# EAGLE board xmas (EAGLE 6.0)
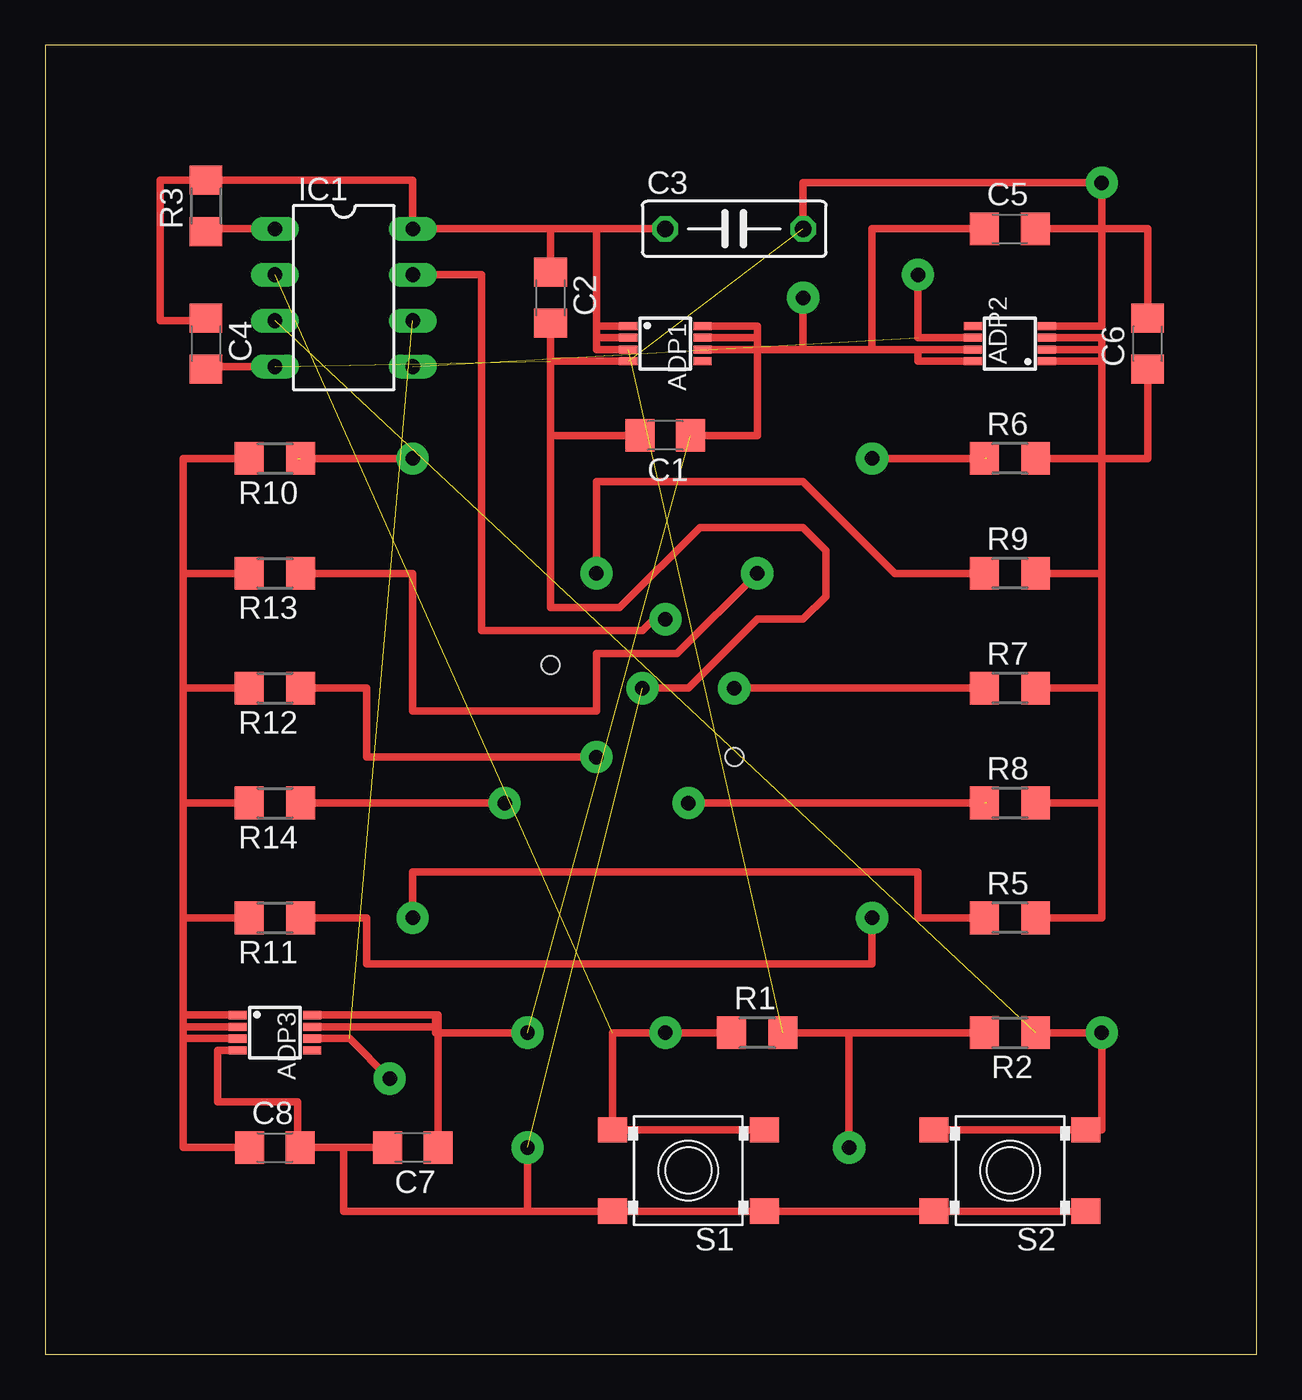
[diagram p0: board, top side]

Size 66.98 x 72.38 mm. Coordinates in mm from the lower left corner, seen from the top.
Outline: 0,0 66.98,0 66.98,72.38 0,72.38 0,0
Copper layers (1*16): Top 0.035mm / dielectric 1.5mm / Bottom 0.035mm
Design rules: minimum track width 10mil, minimum drill 24mil, track to track 8mil, track to pad 8mil, pad to pad 8mil, via to via 8mil, smd to smd 8mil, copper to edge 40mil, drill to drill 8mil, minimum pad ring 10mil, minimum via ring 8mil, stop-mask expansion 4mil, vias tented up to drill 0mil, thermal gap 10mil
Holes 1 mm at 38.1,33.02 27.94,38.1

## Footprints (pad centres in the part's own frame; a part is rotated, then mirrored left to right if it is on the bottom)
MSOP8 = smd 0.45 x 1: GND 0.975,-2.05; IN1 -0.975,2.05; IN2 -0.325,2.05; NR 0.975,2.05; OUT1 -0.975,-2.05; OUT2 -0.325,-2.05; OUT3 0.325,-2.05; SD 0.325,2.05
C1206 = smd 1.6 x 1.8: 1 -1.4,0; 2 1.4,0
C075-032X103 = drill 0.914 octagon: 1 -3.81,0; 2 3.81,0
DIL08 = drill 0.813 long: 1 -3.81,-3.81; 2 -1.27,-3.81; 3 1.27,-3.81; 4 3.81,-3.81; 5 3.81,3.81; 6 1.27,3.81; 7 -1.27,3.81; 8 -3.81,3.81
LSP10 = drill 0.8 pad 1.778: MP 0,0
R1206 = smd 1.6 x 1.803: 1 -1.422,0; 2 1.422,0
SKHMPXE010 = smd 1.6 x 1.4: 1 -4.2,2.25; 2 4.2,2.25; 3 -4.2,-2.25; 4 4.2,-2.25

## Placement (x,y rotation side)
ADP1  ADP3335MSOP8  [MSOP8]  34.29,55.88 270 top
ADP2  ADP3335MSOP8  [MSOP8]  53.34,55.88 90 top
ADP3  ADP3335MSOP8  [MSOP8]  12.7,17.78 270 top
C1  1uF  [C1206]  34.29,50.8 180 top
C2  1uF  [C1206]  27.94,58.42 270 top
C3  47uF  [C075-032X103]  38.1,62.23 0 top
C4  1uF  [C1206]  8.89,55.88 270 top
C5  1uF  [C1206]  53.34,62.23 0 top
C6  1uF  [C1206]  60.96,55.88 90 top
C7  1uF  [C1206]  20.32,11.43 180 top
C8  1uF  [C1206]  12.7,11.43 0 top
IC1  TINY13-20PU  [DIL08]  16.51,58.42 270 top
LSP1  LSP10  [LSP10]  20.32,24.13 0 top
LSP2  LSP10  [LSP10]  45.72,49.53 0 top
LSP3  LSP10  [LSP10]  38.1,36.83 0 top
LSP4  LSP10  [LSP10]  35.56,30.48 0 top
LSP5  LSP10  [LSP10]  30.48,43.18 0 top
LSP6  LSP10  [LSP10]  20.32,49.53 0 top
LSP7  LSP10  [LSP10]  45.72,24.13 0 top
LSP8  LSP10  [LSP10]  30.48,33.02 0 top
LSP9  LSP10  [LSP10]  39.37,43.18 0 top
LSP10  LSP10  [LSP10]  25.4,30.48 0 top
LSP11  LSP10  [LSP10]  34.29,40.64 0 top
LSP12  LSP10  [LSP10]  41.91,58.42 0 top
LSP13  LSP10  [LSP10]  58.42,64.77 0 top
LSP14  LSP10  [LSP10]  33.02,36.83 0 top
LSP15  LSP10  [LSP10]  19.05,15.24 0 top
LSP16  LSP10  [LSP10]  26.67,11.43 0 top
LSP17  LSP10  [LSP10]  34.29,17.78 0 top
LSP18  LSP10  [LSP10]  48.26,59.69 0 top
LSP19  LSP10  [LSP10]  58.42,17.78 0 top
LSP20  LSP10  [LSP10]  44.45,11.43 0 top
LSP21  LSP10  [LSP10]  26.67,17.78 0 top
R1  10k  [R1206]  39.37,17.78 0 top
R2  10k  [R1206]  53.34,17.78 180 top
R3  10k  [R1206]  8.89,63.5 90 top
R5  30  [R1206]  53.34,24.13 0 top
R6  30  [R1206]  53.34,49.53 0 top
R7  30  [R1206]  53.34,36.83 0 top
R8  30  [R1206]  53.34,30.48 0 top
R9  30  [R1206]  53.34,43.18 0 top
R10  30  [R1206]  12.7,49.53 180 top
R11  30  [R1206]  12.7,24.13 180 top
R12  30  [R1206]  12.7,36.83 180 top
R13  30  [R1206]  12.7,43.18 180 top
R14  30  [R1206]  12.7,30.48 180 top
S1  SKHMPSE010  [SKHMPXE010]  35.56,10.16 180 top
S2  SKHMPSE010  [SKHMPXE010]  53.34,10.16 180 top

## Library data of the parts
ADP1-ADP3 LSP1-LSP21 S1 S2 = Gumix
C1-C8 R1-R3 R5-R14 = rcl
IC1 = atmel; MPN: ATTINY13-20PU; OC_FARNELL: 9171550; OC_NEWARK: 96K6521

## Nets
+5V: ADP1.OUT1 ADP1.OUT2 ADP1.OUT3 C2.1 C3.1 C4.1 IC1.8 LSP20.MP R1.2 R2.2 R3.2
GND: ADP1.GND ADP2.GND ADP3.GND C1.2 C2.2 C3.2 C4.2 C5.2 C6.2 C7.2 C8.2 IC1.4 LSP13.MP LSP14.MP LSP16.MP S1.1 S1.2 S2.1 S2.2
N$1: IC1.2 LSP17.MP R1.1 S1.3 S1.4
N$2: IC1.3 LSP19.MP R2.1 S2.3 S2.4
N$3: IC1.1 R3.1
N$4: ADP2.OUT1 ADP2.OUT2 ADP2.OUT3 C6.1 R5.2 R6.2 R7.2 R8.2 R9.2
N$5: LSP1.MP R5.1
N$6: IC1.7 LSP11.MP
N$7: LSP2.MP R6.1
N$8: LSP3.MP R7.1
N$9: LSP4.MP R8.1
N$10: LSP5.MP R9.1
N$11: LSP6.MP R10.1
N$12: ADP3.OUT1 ADP3.OUT2 ADP3.OUT3 C8.1 R10.2 R11.2 R12.2 R13.2 R14.2
N$13: LSP7.MP R11.1
N$14: LSP8.MP R12.1
N$15: LSP9.MP R13.1
N$16: LSP10.MP R14.1
OC0A: ADP2.SD IC1.5 LSP18.MP
OC0B: ADP3.SD IC1.6 LSP15.MP
VCC: ADP1.IN1 ADP1.IN2 ADP1.SD ADP2.IN1 ADP2.IN2 ADP3.IN1 ADP3.IN2 C1.1 C5.1 C7.1 LSP12.MP LSP21.MP

## Tracks (layer width: path | path; a pad name or v marks a point on that pad's centre or on a via)
+5V  (1 unrouted)
  Top 0.406: C2.1 27.94,62.23 | 27.94,62.23 IC1.8 20.32,64.92 R3.2 6.35,64.92 6.35,57.15 8.89,57.15 C4.1 | ADP1.OUT3 30.48,55.55 30.48,56.2 | 30.48,56.2 30.48,56.85 | 30.48,56.85 30.48,62.23 | ADP1.OUT1 30.48,56.85 | ADP1.OUT2 30.48,56.2 | 27.94,62.23 30.48,62.23 | 30.48,62.23 C3.1 | R1.2 44.45,17.78 | 44.45,17.78 R2.2 | LSP20.MP 44.45,17.78
GND  (3 unrouted)
  Top 0.406: LSP14.MP 35.56,36.83 39.37,40.64 41.91,40.64 43.18,41.91 43.18,44.45 41.91,45.72 36.2,45.72 31.75,41.27 27.94,41.27 27.94,50.8 | ADP3.GND 9.52,16.8 9.52,13.97 13.97,13.97 13.97,11.56 C8.2 16.51,11.43 | ADP2.GND 58.42,56.85 58.42,62.23 | 58.42,62.23 C5.2 | C6.2 60.96,62.23 58.42,62.23 | 16.51,11.43 C7.2 | 27.94,50.8 C2.2 27.94,54.91 ADP1.GND | C1.2 27.94,50.8 | IC1.4 8.89,54.61 C4.2 | 58.42,62.23 LSP13.MP 41.91,64.77 C3.2 | S2.1 S2.2 S1.1 S1.2 26.67,7.91 | 26.67,7.91 16.51,7.91 16.51,11.43 | LSP16.MP 26.67,7.91
N$1  (1 unrouted)
  Top 0.406: S1.3 S1.4 31.36,17.78 LSP17.MP R1.1
N$2  (1 unrouted)
  Top 0.406: R2.1 LSP19.MP 58.42,12.41 S2.3 S2.4
N$3
  Top 0.406: IC1.1 8.89,62.23 R3.1
N$4
  Top 0.406: 58.42,30.48 58.42,24.13 R5.2 | 58.42,30.48 58.42,36.83 | 58.42,36.83 58.42,43.18 | 58.42,43.18 58.42,49.53 | 58.42,49.53 R6.2 | R9.2 58.42,43.18 | R7.2 58.42,36.83 | R8.2 58.42,30.48 | ADP2.OUT1 58.42,54.91 | 58.42,54.91 58.42,49.53 | ADP2.OUT2 58.42,55.55 | 58.42,55.55 58.42,54.91 | ADP2.OUT3 58.42,56.2 58.42,55.55 | C6.1 60.96,49.53 58.42,49.53
N$5
  Top 0.406: R5.1 48.26,24.13 48.26,26.67 20.32,26.67 LSP1.MP
N$6
  Top 0.406: LSP11.MP 33.66,40.64 33.02,40 24.13,40 24.13,59.69 IC1.7
N$7  (1 unrouted)
  Top 0.406: LSP2.MP 52.07,49.53
N$8
  Top 0.406: LSP3.MP R7.1
N$9  (1 unrouted)
  Top 0.406: LSP4.MP 52.07,30.48
N$10
  Top 0.406: R9.1 46.99,43.18 41.91,48.26 30.48,48.26 LSP5.MP
N$11  (1 unrouted)
  Top 0.406: LSP6.MP 13.97,49.53
N$12
  Top 0.406: R11.2 7.62,24.13 | 7.62,24.13 7.62,30.48 | 7.62,30.48 7.62,36.83 | 7.62,36.83 7.62,43.18 | 7.62,43.18 7.62,49.53 R10.2 | R13.2 7.62,43.18 | R12.2 7.62,36.83 | R14.2 7.62,30.48 | ADP3.OUT2 7.62,18.11 | 7.62,18.11 7.62,18.76 | 7.62,18.76 7.62,24.13 | ADP3.OUT1 7.62,18.76 | ADP3.OUT3 7.62,17.46 | 7.62,17.46 7.62,18.11 | 7.62,17.46 7.62,11.43 C8.1
N$13
  Top 0.406: R11.1 17.78,24.13 17.78,21.59 45.72,21.59 LSP7.MP
N$14
  Top 0.406: LSP8.MP 17.78,33.02 17.78,36.83 R12.1
N$15
  Top 0.406: LSP9.MP 34.92,38.73 33.66,38.73 33.02,38.73 30.48,38.73 30.48,35.56 20.32,35.56 20.32,43.18 R13.1
N$16
  Top 0.406: LSP10.MP R14.1
OC0A  (1 unrouted)
  Top 0.406: ADP2.SD 48.26,56.2 LSP18.MP
OC0B  (1 unrouted)
  Top 0.406: ADP3.SD 16.84,17.46 LSP15.MP
VCC  (1 unrouted)
  Top 0.406: 45.72,55.55 45.72,62.23 C5.1 | ADP2.IN2 48.26,55.55 | 48.26,55.55 45.72,55.55 | ADP3.IN1 21.59,18.76 | 21.59,18.76 21.72,18.76 21.72,18.11 | 21.72,18.11 C7.1 | ADP3.IN2 21.72,18.11 | ADP1.IN1 39.37,56.85 39.37,56.2 | 39.37,55.55 39.37,50.8 C1.1 | ADP1.SD 39.37,55.55 | ADP1.IN2 39.37,56.2 | 45.72,55.55 41.91,55.55 | 41.91,55.55 39.37,55.55 | 39.37,55.55 39.37,56.2 | ADP2.IN1 48.26,54.91 48.26,55.55 | LSP12.MP 41.91,55.55 | LSP21.MP 21.59,17.78 21.59,18.76